# Altium PCB superhet1.PcbDoc (part 3 of 5)
Units mm, origin at the board's own origin, x right, y up, seen from the top; angles counter-clockwise.
Board outline 77 x 100 mm, 4 copper layers (Top Layer, Internal Plane 1, Signal Layer 1, Bottom Layer), stack 0.778 mm thick; 440 components, 348 nets, 1672 pads, 2403 vias.
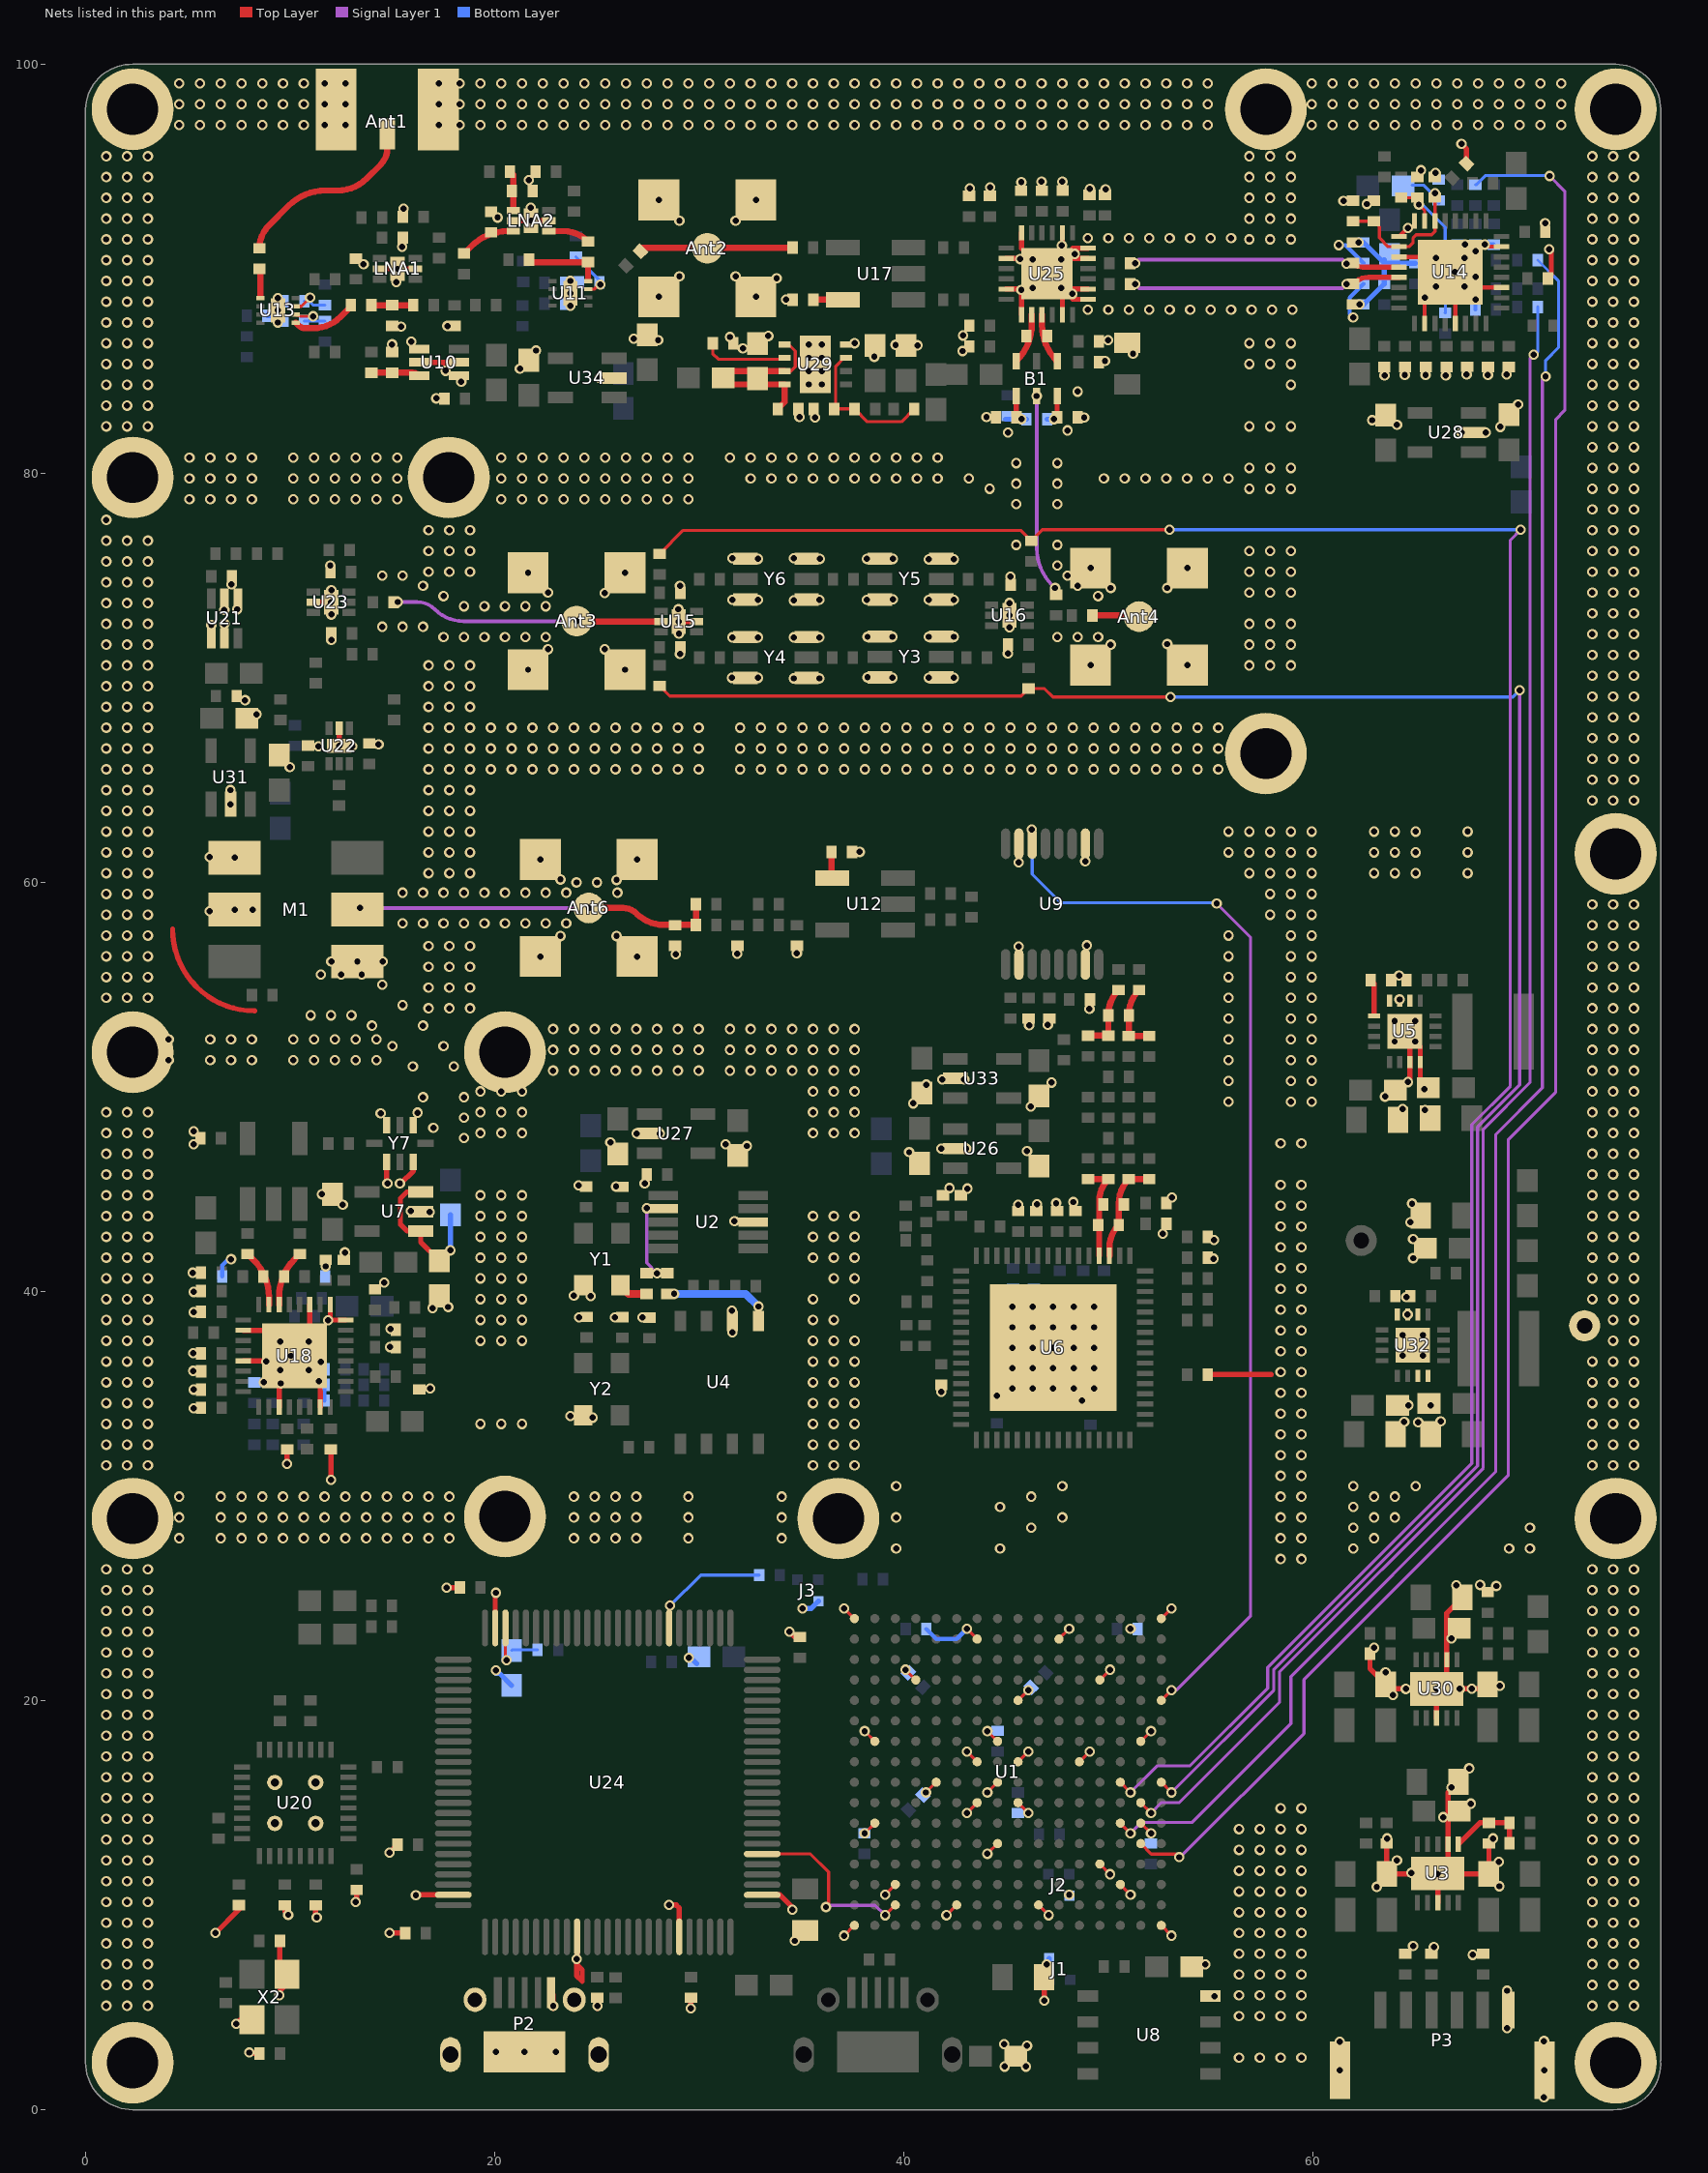
[diagram p5: the nets of this part, all layers, seen from the top]

## Via types
v1: diameter 0.508, hole 0.305, Top Layer to Bottom Layer, 1419 vias
v2: diameter 0.508, hole 0.305, Top Layer to Bottom Layer, tented both sides, 723 vias
v3: diameter 0.5, hole 0.3, Top Layer to Bottom Layer, tented both sides, 254 vias
v4: diameter 1.27, hole 0.762, Top Layer to Bottom Layer, tented both sides, 6 vias
v5: diameter 1.27, hole 0.711, Top Layer to Bottom Layer, tented both sides, 1 vias

## Nets (pads, with @x,y where several pads share a name; then routed paths per layer and width w, separated by ;. In a path a pad name is that pad's centre, name@x,y a point inside that pad or via, vN(x,y) a via of type N, cw(c..) or ccw(c..) an arc to the next point about the centre after c; other vN are vias at no path point) (continued)
GND: Ant1.GND Ant2.GND Ant3.GND Ant4.GND Ant6.GND C1.1 C3.1 C4.1 C5.1 C6.1 C8.1 C9.1 C10.1 C11.1 C12.1 C13.2 C14.2 C15.1 C16.1 C17.2 C18.2 C19.2 C20.2 C21.2 C22.2 C23.1 C24.2 C25.1 C27.2 C29.1 C30.1 C31.2 C32.1 C33.1 C34.2 C35.2 C36.2 C37.1 C38.1 C39.2 C40.2 C41.2 C42.2 C43.2 C45.1 C46.1 C47.1 C48.2 C49.2 C50.2 C51.2 C52.1 C53.1 C54.1 C55.1 C56.1 C57.2 C58.2 C59.1 C60.2 C61.1 C62.2 C63.2 C64.2 C65.2 C66.1 C68.1 C69.2 C72.1 C73.2 C74.2 C75.2 C76.2 C77.1 C78.1 C79.2 C82.1 C83.1 C84.1 C92.2 C93.2 C94.1 C95.1 C96.2 C97.2 C98.2 C99.2 C101.2 C104.1 C106.1 C107.1 C108.1 C109.2 C110.1 C115.1 C116.1 C117.1 C118.1 C119.1 C120.1 C121.1 C122.1 C123.1 C124.1 C125.1 C126.1 C130.1 C131.2 C132.2 C135.2 C136.2 C137.2 C138.2 C139.2 C140.2 C141.2 C142.2 C143.2 C144.2 C146.2 C147.2 C148.2 C149.2 C151.2 C154.1 C155.1 C156.1 C157.1 C162.1 C163.1 C165.1 C167.2 C169.1 C174.2 C176.1 C177.1 C178.1 C179.1 C180.1 C181.1 C182.1 C184.2 C185.2 C186.2 C187.1 C188.1 C189.1 C191.1 C192.1 C193.1 C197.2 C198.2 C199.1 C200.1 C201.2 C202.1 C203.1 C204.2 C205.2 C206.2 C207.2 C208.2 C209.2 C210.2 C211.2 C212.2 C213.2 C214.2 C215.2 C216.1 C217.1 C220.1 C221.1 J1.3 J2.3 J3.3 LED3.2 LNA1.0 LNA1.2 LNA1.5 LNA2.0 LNA2.2 LNA2.5 M1.1 M1.4 M1.5 P2.5 P3.0 P3.6 pad.1 R3.1 R9.2 R10.2 R12.2 R14.2 R16.1 R17.2 R18.2 R20.1 R27.1 R29.1 R32.1 R33.1 R34.1 R47.2 R48.2 R49.2 R50.2 R62.1 R64.2 R81.2 R89.1 R90.1 R102.2 R103.2 R109.2 R111.2 T15.1 U1.A1 U1.A16 U1.B7 U1.B11 U1.D4 U1.D13 U1.E9 U1.G2 U1.G8 U1.G15 U1.H7 U1.H9 U1.H12 U1.J5 U1.J8 U1.K7 U1.K9 U1.L2 U1.L15 U1.M8 U1.N13 U1.P3 U1.P14 U1.R6 U1.R10 U1.T1 U1.T16 U2.8 U3.2 U3.8 U3.11 U4.6 U5.0 U5.6 U5.7 U5.8 U5.15 U5.16 U6.0 U7.2 U8.4 U9.2 U9.7 U9.10 U9.15 U10.1 U10.2 U10.4 U10.5 U11.0 U13.0 U14.0 U14.8 U14.9 U14.11 U14.18 U14.21 U14.27 U14.31 U15.0 U15.5 U16.0 U18.0 U18.8 U18.9 U18.11 U18.18 U18.21 U18.27 U18.31 U20.0 U21.1 U21.2 U21.4 U21.5 U22.0 U22.5 U23.0 U23.5 U24.10 U24.20 U24.27 U24.74 U24.99 U25.0 U25.1 U25.2 U25.5 U25.6 U25.8 U25.12 U25.14 U25.17 U25.19 U25.23 U26.2 U27.2 U28.2 U29.0 U29.4 U30.2 U30.8 U30.11 U31.2 U32.0 U32.6 U32.7 U32.8 U32.15 U32.16 U33.2 U34.2 X2.2 X2.4 Y1.2 Y2.2 Y3.1 Y3.3 Y3.4 Y3.6 Y4.1 Y4.3 Y4.4 Y4.6 Y5.1 Y5.3 Y5.4 Y5.6 Y6.1 Y6.3 Y6.4 Y6.6 Y7.1 Y7.3 Y7.5 Y7.7 | length 156.3
  Top Layer w0.152: v2(37.085,8.51) U1.T1@37.585,9.01 ; v2(37.085,24.51) U1.A1@37.585,24.01 ; v2(38.085,13.51) U1.L2@38.585,14.01 ; v2(38.085,18.51) U1.G2@38.585,18.01 ; v2(39.085,10.51) U1.P3@39.585,11.01 ; v2(40.085,21.51) U1.D4@40.585,21.01 ; v2(41.085,15.51) U1.J5@41.585,16.01 ; v2(42.085,9.51) U1.R6@42.585,10.01 ; v2(43.085,14.51) U1.K7@43.585,15.01 ; v2(43.085,17.51) U1.H7@43.585,17.01 ; v2(43.085,23.51) U1.B7@43.585,23.01 ; v2(44.085,12.51) U1.M8@44.585,13.01 ; v2(44.085,15.51) U1.J8@44.585,16.01 ; v2(44.085,18.51) U1.G8@44.585,18.01 ; U1.K9@45.585,15.01 v2(46.085,14.51) ; U1.H9@45.585,17.01 v2(46.085,17.51) ; U1.E9@45.585,20.01 v2(46.085,20.51) ; U1.R10@46.585,10.01 v2(47.085,9.51) ; U1.B11@47.585,23.01 v2(48.085,23.51) ; U1.H12@48.585,17.01 v2(49.085,17.51) ; U1.N13@49.585,12.01 v2(50.085,11.51) ; U1.D13@49.585,21.01 v2(50.085,21.51) ; U1.P14@50.585,11.01 v2(51.085,10.51) ; U1.L15@51.585,14.01 v2(52.085,13.51) ; U1.G15@51.585,18.01 v2(52.085,18.51) ; U1.T16@52.585,9.01 v2(53.085,8.51) ; U1.A16@52.585,24.01 v2(53.085,24.51)
  Top Layer w0.203: v2(61.265,91.161) v2@61.417,91.161 ; v2(61.963,87.626) 62.01,87.579 v2@62.103,87.579 ; U14.11@64.214,90.584 U14.0@65.964,90.584 ; U14.9@64.214,91.584 64.629,91.999 v2(64.643,91.999) ; U14.18@65.464,87.334 v2(65.464,88.584) ; v2(66.929,89.84) 66.923,89.834 U14.0@66.714,89.834 66.964,89.584 U14.21@66.964,87.334 ; U14.0@67.464,89.084 U14.27@69.214,89.084 ; v2@68.504,91.084 U14.31@69.214,91.084
  Top Layer w0.254: 4.255,57.721 ccw(c8.255,57.721) 8.255,53.721 ; v3(6.35,8.636) 7.5,9.786 R62.1@7.5,10 ; v3(7.366,4.191) 7.575,4.4 X2.4@8.136,4.4 ; U18.21@7.715,36.605 U18.0@9.965,36.605 ; U18.18@7.715,38.105 U18.0@8.965,38.105 ; v3(8.001,2.794) 8.045,2.75 C110.1@8.5,2.75 ; U18.27@9.465,34.355 U18.0@9.465,36.105 ; v3(9.479,5.593) 9.525,5.639 9.525,5.842 9.85,6.167 X2.2@9.85,6.618 9.5,6.968 C108.1@9.5,8.25 ; R64.2@9.75,9.992 9.75,9.681 v3(9.906,9.525) ; v3(9.855,31.572) C136.2@9.855,32.283 ; v2(10.038,36.855) U18.0@10.215,36.855 ; U18.0@10.965,37.605 U18.11@10.965,39.355 ; U23.5@11.137,73.698 v2(12.007,73.698) ; C27.2@11.25,9.992 11.25,9.451 v3(11.303,9.398) ; U18.31@11.465,34.355 11.473,34.363 11.473,35.112 11.465,35.12 U18.0@11.465,35.605 ; v2(11.854,38.589) v2@11.87,38.605 ; U18.9@11.965,39.355 11.965,38.7 v2@11.87,38.605 ; v2(11.993,30.789) C135.2@11.993,32.283 ; v2(12.395,66.675) U22.5@12.395,67.545 ; U18.8@12.715,38.605 v2@11.87,38.605 ; v3(13.208,10.16) 13.25,10.202 C109.2@13.25,10.742 ; LNA1.2@14.38,90 v2(15.25,90) LNA1.5@16.12,90 ; Y7.5@14.719,46.342 14.719,45.327 v2(14.757,45.288) ; v3(14.859,8.636) C6.1@15.629,8.636 ; v3(14.859,12.573) 14.867,12.573 R3.1@15.248,12.954 ; v2(15.367,45.288) 15.418,45.288 16.019,45.889 Y7.7@16.019,46.342 ; v3(16.148,10.481) 16.208,10.541 16.256,10.541 16.295,10.502 U24.99@17.977,10.502 ; U10.2@16.312,85.428 U10.5@18.257,85.428 ; v2(17.602,85.014) 17.602,85.276 ; v3(17.653,25.527) C10.1@18.296,25.527 ; v2(17.686,87.206) R18.2@18.044,87.206 ; U24.74@20.027,23.552 20.027,25.234 v3(20.066,25.273) ; LNA2.2@20.91,92.343 v2(21.78,92.343) LNA2.5@22.65,92.343 ; P2.5@22.763,5.723 22.86,5.626 v3(22.86,5.08) v3@22.86,4.953 ; v3(24.003,7.366) 24.003,6.553 24.278,6.278 24.278,6.823 24.257,6.845 24.257,6.858 24.027,7.088 U24.10@24.027,8.452 ; v3@25.019,4.953 v3(25.019,5.08) C5.1@25.019,5.469 ; v3(25.121,84.658) U34.2@25.837,84.658 ; v2(27.334,45.288) 27.432,45.386 C24.2@27.432,45.72 ; v3(28.524,10.008) 28.869,10.008 29.027,9.85 U24.20@29.027,8.452 ; v2(29,72.75) U15.5@29.87,72.75 ; v3(29.591,4.953) C25.1@29.591,5.469 ; U24.27@33.077,10.502 33.942,10.502 34.538,9.906 34.544,9.906 v3(34.544,9.779) ; v3(34.417,23.368) 34.679,23.106 C4.1@34.925,23.106 ; v3(34.671,8.255) C16.1@35.179,8.763 ; v3(40.259,46.812) 40.259,46.775 C179.1@40.767,46.267 ; v3(41.834,35.103) C65.2@41.834,35.433 ; v3(41.834,46.99) U26.2@42.515,46.99 v3(43.053,46.99) ; U25.17@45.005,89.011 U25.0@46.255,89.011 ; U25.14@45.005,90.511 46.255,90.511 v2(46.305,90.461) U25.0@47.005,89.761 ; R34.1@45.593,43.934 v3(45.593,44.247) ; U25.19@45.755,87.761 U25.0@45.755,89.001 ; U25.0@45.755,91.011 U25.12@45.755,91.761 ; v3(46.863,5.334) 46.863,5.461 C15.1@46.863,6.477 ; U25.23@47.755,87.761 47.755,89.011 U25.2@49.005,89.011 ; U25.8@47.755,91.761 47.755,90.511 U25.5@49.005,90.511 ; U25.0@48.255,88.511 U25.1@49.005,88.511 ; 48.255,91.011 U25.6@49.005,91.011 ; LED3.2@54.077,6.985 54.61,6.985 v3(54.737,7.112) ; C64.2@54.864,35.941 57.963,35.941 ; R109.2@62.787,22.296 62.787,21.57 C189.1@63.561,20.796 63.786,20.571 v2(66.044,20.571) ; R12.2@63.606,13.017 63.606,11.541 C54.1@63.622,11.525 v2(66.08,11.525) U3.11@66.105,11.55 ; v2@64.746,50.418 U5.15@64.746,51.223 U5.0@64.746,52.473 ; C37.1@65.246,50.373 U5.16@65.246,51.223 U5.0@65.246,51.973 ; U30.8@66.044,19.146 v2(66.044,20.571) ; U3.8@66.105,10.125 U3.11@66.105,11.55 ; C53.1@67.122,16.025 66.605,15.508 U3.2@66.605,12.976 66.605,12.05 U3.11@66.266,11.712 ; v2(67.259,96.114) 67.511,95.862 R33.1@67.511,95.146 ; C188.1@67.311,25.046 66.544,24.279 U30.2@66.544,21.997 66.544,21.071 v2(66.044,20.571) ; C191.1@68.529,20.796 68.304,20.571 v2(66.044,20.571) ; R14.2@68.606,13.017 68.606,11.541 C56.1@68.59,11.525 66.453,11.525 U3.11@66.266,11.712 ; C131.2@71.487,89.523 71.653,89.689 71.653,90.856 v3(71.552,90.957) ; U3.11@66.105,11.55 U3.11@66.266,11.712
  Signal Layer 1 w0.254: v2(15.367,45.288) v2@15.418,45.339
  Bottom Layer w0.203: C142.2@6.68,40.742 6.68,41.275 6.985,41.58 v2(7.112,41.58) ; C213.2@10.693,35.56 10.693,35.933 v2(10.915,36.155) ; C212.2@11.684,34.671 C211.2@11.684,35.433 ; C18.2@41.097,23.495 41.58,23.012 42.587,23.012 v2(43.085,23.51) ; v2@45.339,39.289 C60.2@45.339,40.132 ; v2@46.355,39.305 C62.2@46.355,40.132 ; v2(47.3,39.25) 47.3,39.688 R29.1@47.625,40.013 ; v2(48.3,39.25) 48.768,39.718 C58.2@48.768,40.005 ; v2(49.3,39.25) 49.784,39.734 C57.2@49.784,40.005 ; v2(61.265,91.161) 61.594,91.161 C174.2@62.47,90.285 ; v2(61.963,87.626) 61.794,87.795 61.794,88.593 C42.2@62.47,89.269 ; C204.2@67.056,91.186 v2(67.437,91.186) ; C208.2@67.945,88.011 v2(67.945,88.494) ; C209.2@67.945,89.027 v2(67.945,89.611) ; C207.2@67.945,90.424 v2(67.945,90.856) ; v2(68.402,91.186) C206.2@68.834,91.186
  Bottom Layer w0.254: C72.1@8.892,87.714 9.398,87.714 ; v2(9.398,87.376) 9.398,87.714 ; v2(9.398,88.57) 9.398,87.714 ; C59.1@9.416,87.714 9.398,87.714 ; v3(20.066,21.481) 20.066,21.336 20.232,21.336 C12.1@20.828,20.74 ; C94.1@29.718,21.971 C94.1@29.884,21.805 ; v3(35.052,24.511) 35.476,24.511 J3.3@35.823,24.858 ; v3(46.99,7.112) 47.108,7.23 J1.3@47.108,7.4
  other v1: 56.388,2.54 57.404,2.54 58.42,2.54 59.436,2.54 56.388,4.572 57.404,4.572 58.42,4.572 59.436,4.572 1.016,5.08 2.032,5.08 3.048,5.08 73.66,5.08 74.676,5.08 75.692,5.08 56.388,5.588 57.404,5.588 58.42,5.588 59.436,5.588 1.016,6.096 2.032,6.096 3.048,6.096 73.66,6.096 74.676,6.096 75.692,6.096 56.388,6.604 57.404,6.604 58.42,6.604 59.436,6.604 1.016,7.112 2.032,7.112 3.048,7.112 73.66,7.112 74.676,7.112 75.692,7.112 56.388,7.62 57.404,7.62 58.42,7.62 59.436,7.62 1.016,8.128 2.032,8.128 3.048,8.128 73.66,8.128 74.676,8.128 75.692,8.128 56.388,8.636 57.404,8.636 58.42,8.636 59.436,8.636 1.016,9.144 2.032,9.144 3.048,9.144 73.66,9.144 74.676,9.144 75.692,9.144 56.388,9.652 57.404,9.652 58.42,9.652 59.436,9.652 1.016,10.16 2.032,10.16 3.048,10.16 73.66,10.16 74.676,10.16 75.692,10.16 56.388,10.668 57.404,10.668 58.42,10.668 59.436,10.668 1.016,11.176 2.032,11.176 3.048,11.176 73.66,11.176 74.676,11.176 75.692,11.176 56.388,11.684 57.404,11.684 58.42,11.684 59.436,11.684 1.016,12.192 2.032,12.192 3.048,12.192 73.66,12.192 74.676,12.192 75.692,12.192 56.388,12.7 57.404,12.7 58.42,12.7 59.436,12.7 1.016,13.208 2.032,13.208 3.048,13.208 73.66,13.208 74.676,13.208 75.692,13.208 56.388,13.716 57.404,13.716 58.42,13.716 59.436,13.716 1.016,14.224 2.032,14.224 3.048,14.224 73.66,14.224 74.676,14.224 75.692,14.224 58.42,14.732 59.436,14.732 1.016,15.24 2.032,15.24 3.048,15.24 73.66,15.24 74.676,15.24 75.692,15.24 1.016,16.256 2.032,16.256 3.048,16.256 73.66,16.256 74.676,16.256 75.692,16.256 1.016,17.272 2.032,17.272 3.048,17.272 73.66,17.272 74.676,17.272 75.692,17.272 1.016,18.288 2.032,18.288 3.048,18.288 73.66,18.288 74.676,18.288 75.692,18.288 1.016,19.304 2.032,19.304 3.048,19.304 73.66,19.304 74.676,19.304 75.692,19.304 1.016,20.32 2.032,20.32 3.048,20.32 73.66,20.32 74.676,20.32 75.692,20.32 1.016,21.336 2.032,21.336 3.048,21.336 73.66,21.336 74.676,21.336 75.692,21.336 1.016,22.352 2.032,22.352 3.048,22.352 73.66,22.352 74.676,22.352 75.692,22.352 1.016,23.368 2.032,23.368 3.048,23.368 73.66,23.368 74.676,23.368 75.692,23.368 1.016,24.384 2.032,24.384 3.048,24.384 73.66,24.384 74.676,24.384 75.692,24.384 1.016,25.4 2.032,25.4 3.048,25.4 73.66,25.4 74.676,25.4 75.692,25.4 1.016,26.416 2.032,26.416 3.048,26.416 73.66,26.416 74.676,26.416 75.692,26.416 58.42,26.924 59.436,26.924 39.624,27.432 44.704,27.432 61.976,27.432 69.596,27.432 70.612,27.432 4.572,27.94 6.604,27.94 7.62,27.94 8.636,27.94 9.652,27.94 10.668,27.94 11.684,27.94 12.7,27.94 13.716,27.94 14.732,27.94 15.748,27.94 16.764,27.94 17.78,27.94 23.876,27.94 24.892,27.94 25.908,27.94 26.924,27.94 29.464,27.94 34.036,27.94 58.42,27.94 59.436,27.94 62.992,27.94 46.228,28.448 61.976,28.448 70.612,28.448 4.572,28.956 6.604,28.956 7.62,28.956 8.636,28.956 9.652,28.956 10.668,28.956 11.684,28.956 12.7,28.956 13.716,28.956 14.732,28.956 15.748,28.956 16.764,28.956 17.78,28.956 23.876,28.956 24.892,28.956 25.908,28.956 26.924,28.956 29.464,28.956 34.036,28.956 39.624,28.956 47.752,28.956 58.42,28.956 59.436,28.956 62.992,28.956 64.008,28.956 44.704,29.464 61.976,29.464 4.572,29.972 6.604,29.972 7.62,29.972 8.636,29.972 9.652,29.972 10.668,29.972 11.684,29.972 12.7,29.972 13.716,29.972 14.732,29.972 15.748,29.972 16.764,29.972 17.78,29.972 23.876,29.972 24.892,29.972 25.908,29.972 26.924,29.972 29.464,29.972 34.036,29.972 46.228,29.972 58.42,29.972 59.436,29.972 62.992,29.972 64.008,29.972 39.624,30.48 47.752,30.48 61.976,30.48 65.024,30.48 58.42,30.988 59.436,30.988 1.016,31.496 2.032,31.496 3.048,31.496 35.56,31.496 36.576,31.496 37.592,31.496 73.66,31.496 74.676,31.496 75.692,31.496 58.42,32.004 59.436,32.004 1.016,32.512 2.032,32.512 3.048,32.512 35.56,32.512 36.576,32.512 37.592,32.512 73.66,32.512 74.676,32.512 75.692,32.512 58.42,33.02 59.436,33.02 1.016,33.528 2.032,33.528 3.048,33.528 19.304,33.528 20.32,33.528 21.336,33.528 35.56,33.528 36.576,33.528 37.592,33.528 73.66,33.528 74.676,33.528 75.692,33.528 58.42,34.036 59.436,34.036 1.016,34.544 2.032,34.544 3.048,34.544 35.56,34.544 36.576,34.544 37.592,34.544 73.66,34.544 74.676,34.544 75.692,34.544 58.42,35.052 59.436,35.052 1.016,35.56 2.032,35.56 3.048,35.56 35.56,35.56 36.576,35.56 37.592,35.56 73.66,35.56 74.676,35.56 75.692,35.56 58.42,36.068 59.436,36.068 1.016,36.576 2.032,36.576 3.048,36.576 35.56,36.576 36.576,36.576 37.592,36.576 73.66,36.576 74.676,36.576 75.692,36.576 58.42,37.084 59.436,37.084 1.016,37.592 2.032,37.592 3.048,37.592 19.304,37.592 20.32,37.592 21.336,37.592 35.56,37.592 36.576,37.592 37.592,37.592 74.676,37.592 75.692,37.592 58.42,38.1 59.436,38.1 1.016,38.608 2.032,38.608 3.048,38.608 19.304,38.608 20.32,38.608 21.336,38.608 35.56,38.608 36.576,38.608 74.676,38.608 75.692,38.608 58.42,39.116 59.436,39.116 1.016,39.624 2.032,39.624 3.048,39.624 19.304,39.624 20.32,39.624 21.336,39.624 35.56,39.624 37.592,39.624 73.66,39.624 74.676,39.624 75.692,39.624 58.42,40.132 59.436,40.132 1.016,40.64 2.032,40.64 3.048,40.64 19.304,40.64 20.32,40.64 21.336,40.64 36.576,40.64 37.592,40.64 73.66,40.64 74.676,40.64 75.692,40.64 58.42,41.148 59.436,41.148 1.016,41.656 2.032,41.656 3.048,41.656 19.304,41.656 20.32,41.656 21.336,41.656 35.56,41.656 36.576,41.656 37.592,41.656 73.66,41.656 74.676,41.656 75.692,41.656 58.42,42.164 59.436,42.164 1.016,42.672 2.032,42.672 3.048,42.672 19.304,42.672 20.32,42.672 21.336,42.672 35.56,42.672 36.576,42.672 37.592,42.672 73.66,42.672 74.676,42.672 75.692,42.672 58.42,43.18 59.436,43.18 1.016,43.688 2.032,43.688 3.048,43.688 19.304,43.688 20.32,43.688 21.336,43.688 35.56,43.688 36.576,43.688 37.592,43.688 73.66,43.688 74.676,43.688 75.692,43.688 58.42,44.196 59.436,44.196 1.016,44.704 2.032,44.704 3.048,44.704 19.304,44.704 20.32,44.704 21.336,44.704 73.66,44.704 74.676,44.704 75.692,44.704 58.42,45.212 59.436,45.212 1.016,45.72 2.032,45.72 3.048,45.72 73.66,45.72 74.676,45.72 75.692,45.72 1.016,46.736 2.032,46.736 3.048,46.736 73.66,46.736 74.676,46.736 75.692,46.736 58.42,47.244 59.436,47.244 18.5,47.5 1.016,47.752 2.032,47.752 3.048,47.752 19.304,47.752 20.32,47.752 21.336,47.752 35.56,47.752 36.576,47.752 37.592,47.752 73.66,47.752 74.676,47.752 75.692,47.752 17,48 18.5,48.5 1.016,48.768 2.032,48.768 3.048,48.768 19.304,48.768 20.32,48.768 21.336,48.768 35.56,48.768 36.576,48.768 37.592,48.768 73.66,48.768 74.676,48.768 75.692,48.768 55.88,49.276 58.928,49.276 59.944,49.276 16.5,49.5 18.5,49.5 19.304,49.784 20.32,49.784 21.336,49.784 35.56,49.784 36.576,49.784 37.592,49.784 73.66,49.784 74.676,49.784 75.692,49.784 55.88,50.292 58.928,50.292 59.944,50.292 22.86,50.8 23.876,50.8 24.892,50.8 25.908,50.8 26.924,50.8 27.94,50.8 28.956,50.8 29.972,50.8 31.496,50.8 32.512,50.8 33.528,50.8 34.544,50.8 35.56,50.8 36.576,50.8 37.592,50.8 73.66,50.8 74.676,50.8 75.692,50.8 16,51 18,51 4.064,51.308 6.096,51.308 7.112,51.308 8.128,51.308 10.16,51.308 11.176,51.308 12.192,51.308 13.208,51.308 14.224,51.308 55.88,51.308 58.928,51.308 59.944,51.308 22.86,51.816 23.876,51.816 24.892,51.816 25.908,51.816 26.924,51.816 27.94,51.816 28.956,51.816 29.972,51.816 31.496,51.816 32.512,51.816 33.528,51.816 34.544,51.816 35.56,51.816 36.576,51.816 37.592,51.816 73.66,51.816 74.676,51.816 75.692,51.816 15,52 17.5,52 4.064,52.324 6.096,52.324 7.112,52.324 8.128,52.324 10.16,52.324 11.176,52.324 12.192,52.324 13.208,52.324 14.224,52.324 55.88,52.324 58.928,52.324 59.944,52.324 22.86,52.832 23.876,52.832 24.892,52.832 25.908,52.832 26.924,52.832 27.94,52.832 28.956,52.832 29.972,52.832 31.496,52.832 32.512,52.832 33.528,52.832 34.544,52.832 35.56,52.832 36.576,52.832 37.592,52.832 73.66,52.832 74.676,52.832 75.692,52.832 14,53 16.5,53 55.88,53.34 58.928,53.34 59.944,53.34 11,53.5 12,53.5 13,53.5 16.764,53.848 17.78,53.848 18.796,53.848 73.66,53.848 74.676,53.848 75.692,53.848 15.5,54 1.016,54.356 2.032,54.356 3.048,54.356 55.88,54.356 58.928,54.356 59.944,54.356 16.764,54.864 17.78,54.864 18.796,54.864 73.66,54.864 74.676,54.864 75.692,54.864 14.5,55 1.016,55.372 2.032,55.372 3.048,55.372 55.88,55.372 58.928,55.372 59.944,55.372 11.5,55.5 12.5,55.5 13.5,55.5 16.764,55.88 17.78,55.88 18.796,55.88 73.66,55.88 74.676,55.88 75.692,55.88 1.016,56.388 2.032,56.388 3.048,56.388 55.88,56.388 58.928,56.388 59.944,56.388 16.764,56.896 17.78,56.896 18.796,56.896 73.66,56.896 74.676,56.896 75.692,56.896 1.016,57.404 2.032,57.404 3.048,57.404 55.88,57.404 58.928,57.404 59.944,57.404 73.66,57.912 74.676,57.912 75.692,57.912 15.5,58 16.5,58 17.5,58 18.5,58 19.5,58 20.5,58 21.5,58 22.5,58 23.5,58 1.016,58.42 2.032,58.42 3.048,58.42 57.912,58.42 58.928,58.42 59.944,58.42 73.66,58.928 74.676,58.928 75.692,58.928 1.016,59.436 2.032,59.436 3.048,59.436 57.912,59.436 58.928,59.436 59.944,59.436 15.5,59.5 16.5,59.5 17.5,59.5 18.5,59.5 19.5,59.5 20.5,59.5 21.5,59.5 22.5,59.5 23.5,59.5 26,59.5 24,60 25,60 1.016,60.452 2.032,60.452 3.048,60.452 16.764,60.452 17.78,60.452 18.796,60.452 56.896,60.452 57.912,60.452 58.928,60.452 59.944,60.452 62.992,60.452 64.008,60.452 65.024,60.452 67.564,60.452 1.016,61.468 2.032,61.468 3.048,61.468 16.764,61.468 17.78,61.468 18.796,61.468 55.88,61.468 56.896,61.468 57.912,61.468 58.928,61.468 59.944,61.468 62.992,61.468 64.008,61.468 65.024,61.468 67.564,61.468 1.016,62.484 2.032,62.484 3.048,62.484 16.764,62.484 17.78,62.484 18.796,62.484 55.88,62.484 56.896,62.484 57.912,62.484 58.928,62.484 59.944,62.484 62.992,62.484 64.008,62.484 65.024,62.484 67.564,62.484 1.016,63.5 2.032,63.5 3.048,63.5 16.764,63.5 17.78,63.5 18.796,63.5 73.66,64.008 74.676,64.008 75.692,64.008 1.016,64.516 2.032,64.516 3.048,64.516 16.764,64.516 17.78,64.516 18.796,64.516 73.66,65.024 74.676,65.024 75.692,65.024 1.016,65.532 2.032,65.532 3.048,65.532 16.764,65.532 17.78,65.532 18.796,65.532 19.812,65.532 20.828,65.532 21.844,65.532 22.86,65.532 23.876,65.532 24.892,65.532 25.908,65.532 26.924,65.532 27.94,65.532 28.956,65.532 29.972,65.532 32.004,65.532 33.02,65.532 34.036,65.532 35.052,65.532 36.068,65.532 37.084,65.532 38.1,65.532 39.116,65.532 40.132,65.532 41.148,65.532 42.164,65.532 43.18,65.532 44.196,65.532 45.212,65.532 46.228,65.532 47.244,65.532 48.26,65.532 49.276,65.532 50.292,65.532 51.308,65.532 52.324,65.532 53.34,65.532 54.356,65.532 55.372,65.532 73.66,66.04 74.676,66.04 75.692,66.04 1.016,66.548 2.032,66.548 3.048,66.548 16.764,66.548 17.78,66.548 18.796,66.548 19.812,66.548 20.828,66.548 21.844,66.548 22.86,66.548 23.876,66.548 24.892,66.548 25.908,66.548 26.924,66.548 27.94,66.548 28.956,66.548 29.972,66.548 32.004,66.548 33.02,66.548 34.036,66.548 35.052,66.548 36.068,66.548 37.084,66.548 38.1,66.548 39.116,66.548 40.132,66.548 41.148,66.548 42.164,66.548 43.18,66.548 44.196,66.548 45.212,66.548 46.228,66.548 47.244,66.548 48.26,66.548 49.276,66.548 50.292,66.548 51.308,66.548 52.324,66.548 53.34,66.548 54.356,66.548 55.372,66.548 73.66,67.056 74.676,67.056 75.692,67.056 1.016,67.564 2.032,67.564 3.048,67.564 16.764,67.564 17.78,67.564 18.796,67.564 19.812,67.564 20.828,67.564 21.844,67.564 22.86,67.564 23.876,67.564 24.892,67.564 25.908,67.564 26.924,67.564 27.94,67.564 28.956,67.564 29.972,67.564 32.004,67.564 33.02,67.564 34.036,67.564 35.052,67.564 36.068,67.564 37.084,67.564 38.1,67.564 39.116,67.564 40.132,67.564 41.148,67.564 42.164,67.564 43.18,67.564 44.196,67.564 45.212,67.564 46.228,67.564 47.244,67.564 48.26,67.564 49.276,67.564 50.292,67.564 51.308,67.564 52.324,67.564 53.34,67.564 54.356,67.564 55.372,67.564 73.66,68.072 74.676,68.072 75.692,68.072 1.016,68.58 2.032,68.58 3.048,68.58 16.764,68.58 17.78,68.58 18.796,68.58 73.66,69.088 74.676,69.088 75.692,69.088 1.016,69.596 2.032,69.596 3.048,69.596 16.764,69.596 17.78,69.596 18.796,69.596 73.66,70.104 74.676,70.104 75.692,70.104 1.016,70.612 2.032,70.612 3.048,70.612 16.764,70.612 17.78,70.612 18.796,70.612 56.896,70.612 57.912,70.612 58.928,70.612 73.66,71.12 74.676,71.12 75.692,71.12 1.016,71.628 2.032,71.628 3.048,71.628 56.896,71.628 57.912,71.628 58.928,71.628 17.5,72 18.5,72 19.5,72 20.5,72 21.5,72 22.5,72 47.5,72 48.5,72 49.5,72 73.66,72.136 74.676,72.136 75.692,72.136 14.5,72.5 15.5,72.5 16.5,72.5 1.016,72.644 2.032,72.644 3.048,72.644 56.896,72.644 57.912,72.644 58.928,72.644 73.66,73.152 74.676,73.152 75.692,73.152 18.5,73.5 19.5,73.5 20.5,73.5 21.5,73.5 22.5,73.5 1.016,73.66 2.032,73.66 3.048,73.66 17.5,74 49.5,74 56.896,74.168 57.912,74.168 58.928,74.168 73.66,74.168 74.676,74.168 75.692,74.168 16.5,74.5 48.5,74.5 1.016,74.676 2.032,74.676 3.048,74.676 14.5,75 15.5,75 48,75 16.764,75.184 17.78,75.184 18.796,75.184 56.896,75.184 57.912,75.184 58.928,75.184 73.66,75.184 74.676,75.184 75.692,75.184 47.5,75.5 1.016,75.692 2.032,75.692 3.048,75.692 16.764,76.2 17.78,76.2 18.796,76.2 56.896,76.2 57.912,76.2 58.928,76.2 73.66,76.2 74.676,76.2 75.692,76.2 45.5,76.5 47.5,76.5 1.016,76.708 2.032,76.708 3.048,76.708 16.764,77.216 17.78,77.216 18.796,77.216 73.66,77.216 74.676,77.216 75.692,77.216 1.016,77.724 73.66,78.232 74.676,78.232 75.692,78.232 45.5,78.5 47.5,78.5 5.08,78.74 6.096,78.74 7.112,78.74 8.128,78.74 10.16,78.74 11.176,78.74 12.192,78.74 13.208,78.74 14.224,78.74 15.24,78.74 20.32,78.74 21.336,78.74 22.352,78.74 23.368,78.74 24.384,78.74 25.4,78.74 26.416,78.74 27.432,78.74 28.448,78.74 29.464,78.74 44.196,79.248 56.896,79.248 57.912,79.248 58.928,79.248 73.66,79.248 74.676,79.248 75.692,79.248 45.5,79.5 47.5,79.5 5.08,79.756 6.096,79.756 7.112,79.756 8.128,79.756 10.16,79.756 11.176,79.756 12.192,79.756 13.208,79.756 14.224,79.756 15.24,79.756 20.32,79.756 21.336,79.756 22.352,79.756 23.368,79.756 24.384,79.756 25.4,79.756 26.416,79.756 27.432,79.756 28.448,79.756 29.464,79.756 32.512,79.756 33.528,79.756 34.544,79.756 35.56,79.756 36.576,79.756 37.592,79.756 38.608,79.756 39.624,79.756 40.64,79.756 41.656,79.756 43.18,79.756 49.784,79.756 50.8,79.756 51.816,79.756 52.832,79.756 53.848,79.756 54.864,79.756 55.88,79.756 56.896,80.264 57.912,80.264 58.928,80.264 73.66,80.264 74.676,80.264 75.692,80.264 45.5,80.5 47.5,80.5 5.08,80.772 6.096,80.772 7.112,80.772 8.128,80.772 10.16,80.772 11.176,80.772 12.192,80.772 13.208,80.772 14.224,80.772 15.24,80.772 20.32,80.772 21.336,80.772 22.352,80.772 23.368,80.772 24.384,80.772 25.4,80.772 26.416,80.772 27.432,80.772 28.448,80.772 29.464,80.772 31.496,80.772 32.512,80.772 33.528,80.772 34.544,80.772 35.56,80.772 36.576,80.772 37.592,80.772 38.608,80.772 39.624,80.772 40.64,80.772 41.656,80.772 73.66,81.28 74.676,81.28 75.692,81.28 45.1,82 48,82.1 1.016,82.296 2.032,82.296 3.048,82.296 56.896,82.296 57.912,82.296 58.928,82.296 73.66,82.296 74.676,82.296 75.692,82.296 1.016,83.312 2.032,83.312 3.048,83.312 73.66,83.312 74.676,83.312 75.692,83.312 48.5,84 1.016,84.328 2.032,84.328 3.048,84.328 58.928,84.328 73.66,84.328 74.676,84.328 75.692,84.328 1.016,85.344 2.032,85.344 3.048,85.344 56.896,85.344 57.912,85.344 58.928,85.344 73.66,85.344 74.676,85.344 75.692,85.344 1.016,86.36 2.032,86.36 3.048,86.36 56.896,86.36 57.912,86.36 58.928,86.36 73.66,86.36 74.676,86.36 75.692,86.36 1.016,87.376 2.032,87.376 3.048,87.376 73.66,87.376 74.676,87.376 75.692,87.376 49,88 50,88 51,88 52,88 53,88 54,88 55,88 56,88 57,88 58,88 59,88 1.016,88.392 2.032,88.392 3.048,88.392 73.66,88.392 74.676,88.392 75.692,88.392 1.016,89.408 2.032,89.408 3.048,89.408 73.66,89.408 74.676,89.408 75.692,89.408 1.016,90.424 2.032,90.424 3.048,90.424 73.66,90.424 74.676,90.424 75.692,90.424 1.016,91.44 2.032,91.44 3.048,91.44 56.896,91.44 57.912,91.44 58.928,91.44 73.66,91.44 74.676,91.44 75.692,91.44 49,91.5 50,91.5 51,91.5 52,91.5 53,91.5 54,91.5 55,91.5 56,91.5 1.016,92.456 2.032,92.456 3.048,92.456 56.896,92.456 57.912,92.456 58.928,92.456 73.66,92.456 74.676,92.456 75.692,92.456 1.016,93.472 2.032,93.472 3.048,93.472 56.896,93.472 57.912,93.472 58.928,93.472 73.66,93.472 74.676,93.472 75.692,93.472 1.016,94.488 2.032,94.488 3.048,94.488 56.896,94.488 57.912,94.488 58.928,94.488 73.66,94.488 74.676,94.488 75.692,94.488 1.016,95.504 2.032,95.504 3.048,95.504 56.896,95.504 57.912,95.504 58.928,95.504 73.66,95.504 74.676,95.504 75.692,95.504 4.572,97.028 5.588,97.028 6.604,97.028 7.62,97.028 8.636,97.028 9.652,97.028 10.668,97.028 11.684,97.028 12.7,97.028 17.272,97.028 18.288,97.028 19.304,97.028 20.32,97.028 21.336,97.028 22.352,97.028 23.368,97.028 24.384,97.028 25.4,97.028 26.416,97.028 27.432,97.028 28.448,97.028 29.464,97.028 30.48,97.028 31.496,97.028 32.512,97.028 33.528,97.028 34.544,97.028 35.56,97.028 36.576,97.028 37.592,97.028 38.608,97.028 39.624,97.028 40.64,97.028 41.656,97.028 42.672,97.028 43.688,97.028 44.704,97.028 45.72,97.028 46.736,97.028 47.752,97.028 48.768,97.028 49.784,97.028 50.8,97.028 51.816,97.028 52.832,97.028 53.848,97.028 54.864,97.028 59.944,97.028 60.96,97.028 61.976,97.028 62.992,97.028 64.008,97.028 65.024,97.028 66.04,97.028 67.056,97.028 68.072,97.028 69.088,97.028 70.104,97.028 71.12,97.028 72.136,97.028 4.572,98.044 5.588,98.044 6.604,98.044 7.62,98.044 8.636,98.044 9.652,98.044 10.668,98.044 11.684,98.044 12.7,98.044 17.272,98.044 18.288,98.044 19.304,98.044 20.32,98.044 21.336,98.044 22.352,98.044 23.368,98.044 24.384,98.044 25.4,98.044 26.416,98.044 27.432,98.044 28.448,98.044 29.464,98.044 30.48,98.044 31.496,98.044 32.512,98.044 33.528,98.044 34.544,98.044 35.56,98.044 36.576,98.044 37.592,98.044 38.608,98.044 39.624,98.044 40.64,98.044 41.656,98.044 42.672,98.044 43.688,98.044 44.704,98.044 45.72,98.044 46.736,98.044 47.752,98.044 48.768,98.044 49.784,98.044 50.8,98.044 51.816,98.044 52.832,98.044 53.848,98.044 54.864,98.044 59.944,98.044 60.96,98.044 61.976,98.044 62.992,98.044 64.008,98.044 65.024,98.044 66.04,98.044 67.056,98.044 68.072,98.044 69.088,98.044 70.104,98.044 71.12,98.044 72.136,98.044 4.572,99.06 5.588,99.06 6.604,99.06 7.62,99.06 8.636,99.06 9.652,99.06 10.668,99.06 11.684,99.06 12.7,99.06 17.272,99.06 18.288,99.06 19.304,99.06 20.32,99.06 21.336,99.06 22.352,99.06 23.368,99.06 24.384,99.06 25.4,99.06 26.416,99.06 27.432,99.06 28.448,99.06 29.464,99.06 30.48,99.06 31.496,99.06 32.512,99.06 33.528,99.06 34.544,99.06 35.56,99.06 36.576,99.06 37.592,99.06 38.608,99.06 39.624,99.06 40.64,99.06 41.656,99.06 42.672,99.06 43.688,99.06 44.704,99.06 45.72,99.06 46.736,99.06 47.752,99.06 48.768,99.06 49.784,99.06 50.8,99.06 51.816,99.06 52.832,99.06 53.848,99.06 54.864,99.06 59.944,99.06 60.96,99.06 61.976,99.06 62.992,99.06 64.008,99.06 65.024,99.06 66.04,99.06 67.056,99.06 68.072,99.06 69.088,99.06 70.104,99.06 71.12,99.06 72.136,99.06
  other v2: 71.298,0.61 61.321,1.929 71.321,1.929 44.933,2.108 45.974,2.108 20.066,2.819 22.987,2.819 21.463,2.823 46.025,3.124 44.907,3.2 61.316,3.327 71.298,3.353 69.494,3.988 55.194,5.537 69.494,5.817 67.818,7.569 65.913,7.95 64.897,8.001 48.085,10.51 63.119,10.897 69.113,10.922 64.821,11.582 69.088,12.116 64.11,12.192 63.627,13.259 68.809,13.259 66.37,14.3 67.716,14.961 66.777,15.748 67.64,16.688 63.906,20.269 64.541,20.571 67.183,20.571 67.767,20.574 69.139,20.726 63.551,21.387 62.992,22.581 66.777,23.038 51.085,23.51 68.961,25.603 67.005,25.629 68.174,25.654 65.151,33.604 64.465,33.63 66.243,33.655 24.79,33.833 23.698,33.909 5.283,34.29 64.668,34.442 65.758,34.442 48.717,34.671 44.552,34.9 5.283,35.204 16.84,35.255 45.3,35.25 46.3,35.25 47.3,35.25 48.3,35.25 49.3,35.25 9.55,35.509 8.712,35.56 11.405,35.611 5.258,36.119 9.515,36.155 45.3,36.25 46.3,36.25 47.3,36.25 48.3,36.25 49.3,36.25 11.506,36.551 8.839,36.576 5.258,36.982 45.3,37.25 46.3,37.25 47.3,37.25 48.3,37.25 49.3,37.25 14.884,37.287 9.515,37.555 10.915,37.555 31.623,37.998 14.91,38.176 45.3,38.25 46.3,38.25 47.3,38.25 48.3,38.25 49.3,38.25 24.13,38.735 25.883,38.735 27.229,38.735 64.631,38.873 5.283,38.989 31.598,39.065 16.967,39.192 17.729,39.243 45.3,39.25 46.3,39.25 64.567,39.726 24.689,39.776 23.876,39.802 5.283,39.98 14.605,40.437 5.232,40.919 55.143,41.605 64.897,41.631 12.675,41.91 55.169,42.52 64.897,42.57 52.654,42.824 64.77,43.383 31.725,43.434 16.815,43.891 15.9,43.942 12.573,44.247 46.507,44.272 64.846,44.298 47.447,44.323 48.285,44.374 53.111,44.602 11.557,44.755 43.104,45.034 42.24,45.06 25.933,45.136 24.105,45.187 46.025,46.863 32.334,47.117 5.283,47.193 31.293,47.193 25.654,47.295 26.949,47.727 28.067,47.727 5.283,47.828 14.427,48.717 16.231,48.743 65.481,48.87 64.389,48.92 46.203,49.047 40.462,49.2 63.525,49.53 65.456,49.886 41.097,50.114 47.219,50.216 64.643,50.241 41.885,50.368 42.951,50.368 46.126,53.01 47.041,53.035 49.073,53.823 64.237,54.28 64.211,55.448 12.014,56.134 13.287,56.134 14.529,56.134 22.229,56.38 26.969,56.38 28.854,56.49 31.852,56.515 34.773,56.54 45.618,56.871 48.946,56.921 23.216,57.379 25.959,57.379 6.071,58.598 7.287,58.674 8.179,58.674 25.959,60.122 23.216,60.147 45.618,60.985 48.87,61.036 22.229,61.12 26.969,61.12 7.287,61.214 6.071,61.239 37.846,61.493 7.087,63.825 7.087,64.516 9.982,65.634 11.379,66.65 13.03,66.65 14.326,66.751 8.357,68.224 7.798,68.91 34.62,69.977 35.865,69.977 31.598,70.002 32.868,70.002 39.446,70.002 41.224,70.002 42.443,70.002 38.227,70.028 21.633,70.401 26.373,70.401 49.13,70.63 53.87,70.63 29.058,71.171 45.085,71.196 22.606,71.399 25.375,71.399 50.114,71.628 52.883,71.653 12.014,71.857 31.623,71.984 32.868,71.984 34.62,71.984 35.865,71.984 38.227,72.009 39.446,72.009 41.224,72.009 42.443,72.009 29.007,72.161 45.161,72.466 6.147,72.593 6.782,72.644 45.163,73.053 12.014,73.101 6.782,73.33 7.417,73.355 28.981,73.355 45.161,73.66 34.62,73.787 31.623,73.812 32.868,73.812 35.865,73.812 38.202,73.812 41.224,73.812 42.443,73.812 39.472,73.838 25.375,74.143 22.606,74.168 12.014,74.295 50.114,74.397 52.883,74.397 29.058,74.498 7.137,74.574 45.212,74.955 21.633,75.141 26.373,75.141 49.13,75.37 53.87,75.37 11.963,75.489 41.224,75.794 42.443,75.794 32.868,75.819 35.89,75.819 38.202,75.819 39.472,75.819 31.623,75.844 34.62,75.844 67.259,81.991 68.453,81.991 69.164,82.271 64.11,82.372 62.89,82.601 35.662,82.728 48.819,82.728 34.9,82.753 44.044,82.753 70.028,83.363 17.145,83.668 18.364,84.48 63.5,84.785 66.497,84.785 64.491,84.811 65.507,84.811 68.555,84.811 67.513,84.836 69.469,84.836 21.234,85.115 49.835,85.496 38.557,85.7 51.206,85.852 42.875,85.979 22.022,86.004 32.131,86.106 40.665,86.258 39.599,86.284 14.986,86.309 37.592,86.36 15.926,86.436 27.991,86.512 49.987,86.512 26.797,86.589 31.496,86.665 33.376,86.716 42.901,86.741 15.418,87.173 9.408,87.968 23.698,88.189 34.239,88.494 28.03,88.63 32.77,88.63 48.235,88.773 23.7,88.8 45.745,88.976 46.305,89.061 47.705,89.061 66.014,89.134 67.414,89.134 15.189,89.357 23.698,89.408 33.782,89.535 29.032,89.637 31.775,89.637 13.589,90.221 45.695,90.475 47.705,90.461 66.014,90.534 67.414,90.534 48.362,90.729 15.469,91.084 47.727,91.135 71.349,92.227 29.032,92.354 31.775,92.354 20.142,92.507 15.545,92.939 21.768,92.989 62.636,93.167 61.493,93.32 28.03,93.37 32.77,93.37 49.86,93.878 49.098,93.904 43.231,93.929 44.221,93.98 45.745,94.234 46.736,94.259 47.752,94.259 21.666,94.336 65.989,94.691 65.278,94.818
  other v3: 29.489,22.098 64.381,36.873 65.381,36.873 64.381,37.873 65.381,37.873 11.739,41.228 63.996,52.223 64.996,52.223 63.996,53.223 64.996,53.223 35.35,84.35 36,84.35 35.35,85 36,85 35.35,85.65 36,85.65 35.35,86.3 36,86.3
HSWAPEN: R45.1@32.926,26.137 U24.57 | length 6.5
  Top Layer w0.152: U24.57@28.527,23.552 28.527,24.793 28.575,24.841 v3(28.575,24.638)
  Bottom Layer w0.152: v3(28.575,24.638) 30.074,26.137 R45.1@32.926,26.137
IF1_P: B1.4 C127.2 U25.21 | length 2.5
  Top Layer w0.305: U25.21@46.755,87.761 46.755,87.272 ccw(c49.288,87.272) B1.4@47.497,85.481
IF_800: R76.1 R77.1 U1.J14 | length 114.4
  Top Layer w0.152: R76.1@28.067,76.065 29.218,77.216 45.712,77.216 R77.1@46.228,76.7 46.769,77.241 v3(52.984,77.241) ; U1.J14@50.585,16.01 v2(51.085,15.51)
  Signal Layer 1 w0.152: v2(51.085,15.51) 52.39,16.815 53.995,16.815 57.785,20.605 57.785,21.615 67.767,31.598 67.767,48.158 69.651,50.041 69.651,76.737 v3(70.155,77.241)
  Bottom Layer w0.152: v3(52.984,77.241) v3(70.155,77.241) v3@70.256,77.241
IF_900: R74.1 R75.1 U1.J16 | length 104.3
  Top Layer w0.152: R74.1@28.067,69.604 28.558,69.113 45.737,69.113 R75.1@46.101,69.477 46.88,69.477 47.295,69.063 v3(53.035,69.063) ; U1.J16@52.585,16.01 v2(53.085,15.51)
  Signal Layer 1 w0.152: v2(53.085,15.51) 58.09,20.515 58.09,21.525 68.047,31.482 68.047,48.042 70.104,50.099 v3(70.104,69.393)
  Bottom Layer w0.152: v3(53.035,69.063) 69.774,69.063 v3(70.104,69.393)
INIT_B: U1.R3 U24.31 | length 9.3
  Top Layer w0.152: U24.31@33.077,12.502 35.437,12.502 36.322,11.617 36.322,9.906 v3(36.195,9.906) ; v2(39.085,9.51) U1.R3@39.585,10.01
  Signal Layer 1 w0.152: v3(36.195,9.906) 36.282,9.993 38.602,9.993 v2(39.085,9.51)
LD-2871: R116.2 U1.K15 | length 82.7
  Top Layer w0.152: U1.K15@51.585,15.01 v2(52.085,14.51)
  Signal Layer 1 w0.152: v2(52.085,14.51) 52.586,15.011 53.467,15.011 58.369,19.914 58.369,21.409 68.326,31.366 68.326,47.926 70.612,50.212 70.612,85.623 v3(70.79,85.801)
  Bottom Layer w0.152: v3(70.79,85.801) 70.866,85.801 70.993,85.928 R116.2@70.993,88.138
LF_F_N: C89.1 R19.1 R58.1 R67.1 U6.52 | length 4.9
  Top Layer w0.305: R58.1@49,45.5 R67.1@50,45.5 ccw(c51.087,44.414) 49.55,44.414 U6.52@49.55,41.75
LF_F_P: C89.2 R19.2 R39.2 R52.2 U6.51 | length 5
  Top Layer w0.305: U6.51@50.05,41.75 50.05,42.144 cw(c51.614,42.144) C89.2@50.508,43.25 50.508,44.304 cw(c52.188,44.304) R39.2@51,45.492 R52.2@52,45.492
LF_N: C85.1 C91.2 R54.2 R59.2 | length 3.4
  Top Layer w0.305: R59.2@49,52.508 R54.2@50,52.508 C85.1@50,53.5 50,53.535 cw(c51.707,53.535) C91.2@50.5,54.742
LF_P: C81.2 C85.2 R37.1 R41.1 | length 3.4
  Top Layer w0.305: C81.2@51.5,54.742 ccw(c52.707,53.535) 51,53.535 R37.1@51,52.5 R41.1@52,52.5
LO1_N: C134.1 L1.2 U14.13 | length 13.1
  Top Layer w0.178: C134.1@51.061,89.253 v2(51.305,89.253)
  Top Layer w0.254: L1.2@61.962,89.269 cw(c62.722,88.508) 62.722,89.584 U14.13@64.214,89.584
  Signal Layer 1 w0.178: v2(51.305,89.253) 51.506,89.052 61.443,89.052 v2(61.646,89.256)
LO1_P: C133.1 L4.2 U14.12 | length 13
  Top Layer w0.254: L4.2@61.962,90.285 ccw(c62.447,90.77) 62.447,90.084 U14.12@64.214,90.084
  Top Layer w0.305: C133.1@51.061,90.269 v2(51.305,90.269)
  Signal Layer 1 w0.178: v2(51.305,90.269) 51.486,90.449 61.443,90.449 v2(61.646,90.246)
LO2_N: C150.1 L2.2 U18.14 | length 2.8
  Top Layer w0.305: U18.14@9.465,39.355 9.465,39.772 cw(c12.005,39.772) 10.209,41.568 C150.1@10.469,41.828
LO2_P: C152.1 L5.2 U18.15 | length 2.8
  Top Layer w0.305: C152.1@7.929,41.828 8.221,41.536 cw(c6.425,39.74) 8.965,39.74 U18.15@8.965,39.355
MISO-2871: R115.2 U1.L14 | length 88.2
  Top Layer w0.152: U1.L14@50.585,14.01 v2(51.085,13.51)
  Signal Layer 1 w0.152: v2(51.085,13.51) 51.621,14.046 54.102,14.046 58.928,18.872 58.928,21.178 68.936,31.185 68.936,47.674 71.222,49.96 71.222,84.582 v3(71.374,84.734)
  Bottom Layer w0.152: R115.2@70.993,90.424 72.005,89.412 72.005,86.147 71.374,85.516 v3(71.374,84.734)
MOSI-2871: R113.2 U1.M15 | length 96.3
  Top Layer w0.152: U1.M15@51.585,13.01 52.098,12.497 53.315,12.497 v3(53.467,12.344)
  Signal Layer 1 w0.152: v3(53.467,12.344) 53.518,12.344 59.563,18.39 59.563,21.023 69.545,31.005 69.545,47.421 71.861,49.736 71.861,82.621 72.314,83.074 72.314,93.802 v3(71.577,94.539)
  Bottom Layer w0.152: R113.2@67.945,94.107 67.988,94.107 68.445,94.564 71.552,94.564 v3(71.577,94.539)
MOSI-LF: U1.E16 U9.14 | length 53.4
  Top Layer w0.152: U1.E16@52.585,20.01 v2(53.085,20.51)
  Signal Layer 1 w0.152: v2(53.085,20.51) 53.327,20.51 56.947,24.13 56.947,57.328 v3(55.296,58.979)
  Bottom Layer w0.152: v2(46.253,62.586) cw(c46.196,62.529) 46.277,62.529 46.277,60.403 47.672,59.008 55.266,59.008 v3(55.296,58.979)
NetAnt1_1: Ant1.1 C67.2 | length 9.5
  Top Layer w0.305: C67.2@8.5,91.008 cw(c10.073,91.008) 8.961,92.12 9.924,93.084 cw(c11.72,91.288) 11.72,93.828 12.319,93.828 ccw(c12.319,95.851) 13.75,94.42 14.427,95.098 ccw(c13.648,95.877) 14.75,95.877 Ant1.1@14.75,96.8
NetAnt2_1: Ant2.1 C71.1 C129.2 | length 7.4
  Top Layer w0.305: C71.1@27.153,91.031 C129.2@34.559,91.031
NetAnt3_1: Ant3.1 C160.2 U15.2 | length 13.1
  Top Layer w0.305: v2(24.003,72.771) ccw(c24.054,72.822) 24.054,72.75 U15.2@28.13,72.75
  Signal Layer 1 w0.178: v2(15.265,73.711) 16.21,73.711 cw(c16.21,72.497) 17.069,73.355 ccw(c18.479,74.766) 18.479,72.771 v2(24.003,72.771)
NetAnt4_1: Ant4.1 C222.1 | length 2.4
  Top Layer w0.305: C222.1@49.217,73.05 Ant4.1@51.378,73.05 ; Ant4.1@51.378,73.05 cw(c51.378,72.878) Ant4.1@51.5,73 ccw(c51.378,72.878) Ant4.1@51.378,73.05
NetAnt6_1: Ant6.1 C82.2 M1.2 R35.1 R105.1 | length 17.8
  Top Layer w0.305: M1.2@13.287,58.674 13.262,58.649 v2(13.411,58.75) ; Ant6.1@24.599,58.75 26.275,58.75 cw(c26.275,57.797) 26.949,58.471 ccw(c28.269,59.791) 28.269,57.924 R35.1@29.837,57.924 R105.1@29.837,58.94
  Signal Layer 1 w0.178: v2(13.411,58.75) v2@24.52,58.75
  other v2: 24.613,58.75
NetB1_1: B1.1 C116.2 R78.2 R79.1 | length 2
  Top Layer w0.254: C116.2@45.497,82.761 B1.1@45.497,83.781
  Bottom Layer w0.254: R78.2@44.973,82.649 v2(45.748,82.649) R79.1@45.997,82.649
NetB1_2: B1.2 C111.2 | length 9.6
  Signal Layer 1 w0.178: v1(46.497,83.781) 46.497,76.348 ccw(c49.037,76.348) 47.241,74.552 v1(47.396,74.397)
NetB1_3: B1.3 C117.2 R79.2 | length 1.4
  Top Layer w0.254: C117.2@47.497,82.755 B1.3@47.497,83.781
  Bottom Layer w0.254: R79.2@47.005,82.649 v2(47.343,82.649)
NetB1_6: B1.6 C127.1 U25.20 | length 2.5
  Top Layer w0.305: B1.6@45.497,85.481 45.511,85.495 ccw(c43.715,87.291) 46.255,87.291 U25.20@46.255,87.761
NetC1_2: C1.2 C11.2 R82.1 U29.5 U29.7 U29.8 | length 9.2
  Top Layer w0.152: U29.7@34.175,85 34.479,85 34.696,85.217 34.696,85.979 U29.5@34.375,86.3
  Top Layer w0.305: R82.1@31.178,84.811 31.638,84.35 U29.8@34.175,84.35 34.175,83.483 C11.2@33.842,83.15 ; R82.1@31.367,85 U29.7@34.175,85
NetC2_2: C2.2 R8.2 R9.1 U29.3 | length 7.1
  Top Layer w0.152: U29.3@37.175,85.65 37.088,85.65 36.672,85.234 36.672,83.222 36.744,83.15 R8.2@37.592,83.15 38.217,82.525 39.888,82.525 C2.2@40.513,83.15
NetC3_2: C3.2 C166.1 LNA2.3 | length 2.8
  Top Layer w0.305: C166.1@18.5,90.75 18.849,91.099 cw(c20.645,89.303) 20.645,91.843 LNA2.3@20.91,91.843
NetC7_1: C7.1 R1.1 R14.1 U3.1 | length 3.9
  Top Layer w0.254: U3.1@67.105,12.976 68.154,14.025 R14.1@68.606,14.025 C7.1@69.606,14.025 R1.1@69.606,13.025
NetC12_2: C12.2 R106.2 U24.73 | length 2.9
  Top Layer w0.152: U24.73@20.527,23.552 20.527,22.018 v3(20.574,21.971)
  Bottom Layer w0.152: C12.2@20.828,22.454 20.853,22.479 R106.2@22.098,22.479
NetC23_2: C23.2 U29.6 | length 4.2
  Top Layer w0.152: C23.2@30.658,86.36 30.658,85.852 30.925,85.584 34.175,85.584 U29.6@34.175,85.65
NetC26_1: C26.1 Y1.3 | length 1.5
  Top Layer w0.381: Y1.3@26.138,40.301 26.553,39.886 C26.1@27.432,39.886
NetC26_2: C26.2 C28.2 U2.2 | length 4.4
  Top Layer w0.152: C26.2@27.432,40.894 v2(27.94,40.894) C28.2@28.448,40.894
  Signal Layer 1 w0.152: v2(27.432,44.069) 27.432,41.402 v2(27.94,40.894)
NetC28_1: C28.1 U4.5 | length 4.7
  Top Layer w0.381: C28.1@28.448,39.886 v2(28.77,39.886)
  Bottom Layer w0.381: v2(28.77,39.886) 32.275,39.886 v2(32.893,39.268)
NetC31_1: C31.1 LNA2.1 R13.1 | length 2
  Top Layer w0.305: R13.1@20.75,94.75 20.91,94.59 LNA2.1@20.91,92.843
NetC33_2: C33.2 L20.2 U10.3 | length 2.4
  Top Layer w0.305: L20.2@13.98,84.92 C33.2@14.996,84.92 15.969,84.92 cw(c15.969,84.435) U10.3@16.312,84.778
NetC39_1: C39.1 C40.1 C41.1 C98.1 FB5.1 U14.6 U14.10 | length 10
  Top Layer w0.152: C39.1@61.962,92.325 C98.1@62.978,92.325 63.246,92.057 63.246,91.516 63.678,91.084 U14.10@64.214,91.084 64.693,91.084 64.897,91.288 64.897,91.516 65.049,91.669 65.811,91.669 65.964,91.821 U14.6@65.964,92.334 65.964,93.193 ; 65.964,93.193 65.964,93.734 65.964,93.193
  Bottom Layer w0.152: FB5.1@64.844,94.095 65.407,94.095 C40.1@66.153,93.349 66.153,93.223 66.148,93.218 65.964,93.402 v2(65.964,93.701)
NetC42_1: C42.1 C174.1 FB7.2 L1.1 L4.1 R28.1 R72.1 | length 6
  Top Layer w0.152: L4.1@61.962,91.293 v2(62.225,91.293)
  Bottom Layer w0.152: v2(62.277,88.261) C42.1@62.47,88.261
  Bottom Layer w0.254: C174.1@62.47,91.293 FB7.2@63.486,90.277 ; C42.1@62.486,88.261 R28.1@63.486,89.261 FB7.2@63.486,90.277 ; FB7.2@63.486,90.437 FB7.2@63.486,90.277 ; R72.1@65.01,90.277 FB7.2@63.486,90.277
NetC43_1: C43.1 U5.9 | length 1.6
  Top Layer w0.254: U5.9@62.996,53.473 C43.1@62.996,55.053
NetC44_1: C44.1 C168.1 U11.4 | length 3.8
  Top Layer w0.305: C168.1@21.66,90.324 24.556,90.324 C44.1@24.564,90.332 U11.4@24.564,89.484
NetC44_2: C44.2 LNA2.4 | length 2
  Top Layer w0.305: LNA2.4@22.65,91.843 23.35,91.843 cw(c23.35,90.126) C44.2@24.564,91.34
NetC46_2: C46.2 R128.2 U7.1 U7.3 | length 7.1
  Top Layer w0.254: U7.3@16.381,44.868 15.709,44.868 15.392,44.552 15.392,43.282 15.721,42.953 U7.1@16.381,42.953 16.381,42.42 C46.2@17.297,41.504
  Bottom Layer w0.254: v2(17.831,42.012) R128.2@17.831,43.739
NetC47_2: C47.2 U17.4 | length 1.4
  Top Layer w0.305: C47.2@35.575,88.491 U17.4@37.023,88.491
NetC49_1: C49.1 U12.5 | length 1.3
  Top Layer w0.305: C49.1@36.466,61.482 36.466,60.316 ccw(c36.613,60.316) U12.5@36.509,60.212
NetC51_1: C51.1 C100.1 R73.2 U14.7 | length 8.1
  Top Layer w0.152: C100.1@64.313,93.48 65.176,93.48 v2(65.176,93.142) 65.464,92.854 U14.7@65.464,92.334
  Bottom Layer w0.152: v2(65.176,93.142) 65.354,93.142 66.464,92.032 66.464,90.738 66.471,90.731 66.471,87.849 R73.2@66.464,87.842
NetC59_2: C59.2 R55.1 U13.6 | length 2.2
  Top Layer w0.152: U13.6@10.278,87.768 10.322,87.724 10.425,87.724 10.468,87.681 v2(11.125,87.681)
  Bottom Layer w0.152: C59.2@10.686,87.452 11.258,87.452 ; v2(11.125,87.681) 11.125,87.585 11.258,87.452 ; R55.1@11.694,87.452 11.258,87.452
NetC61_2: C61.2 R57.2 U13.7 | length 2
  Top Layer w0.152: U13.7@10.278,88.168 10.546,88.168 v2(10.973,88.595)
  Bottom Layer w0.152: C61.2@10.693,88.417 10.94,88.417 11.135,88.222 R57.2@11.694,88.222
NetC66_2: C66.2 R63.1 U11.3 | length 2.5
  Top Layer w0.152: U11.3@24.57,89 24.865,89 25.095,89.23 v2(25.171,89.23)
  Bottom Layer w0.152: R63.1@23.973,90.586 25.171,89.388 v2(25.171,89.23)
NetC67_1: C67.1 U13.1 | length 1.3
  Top Layer w0.305: C67.1@8.5,90 cw(c8.408,89.908) 8.538,89.908 8.538,88.671
NetC70_1: C70.1 R16.2 R104.2 | length 2
  Top Layer w0.305: C70.1@13.972,88.222 R16.2@14.996,88.222 R104.2@16.012,88.222
NetC70_2: C70.2 U13.5 | length 3.2
  Top Layer w0.305: U13.5@10.278,87.368 10.43,87.216 ccw(c10.719,87.506) 10.719,87.097 11.122,87.097 ccw(c11.122,89.004) 12.471,87.655 12.912,88.096 ccw(c12.785,88.222) C70.2@12.964,88.222